# Altium PCB PCB_Ej3.PcbDoc
Units mm, origin at the board's own origin, x right, y up, seen from the top; angles counter-clockwise.
Board outline 100.08 x 100.08 mm, 2 copper layers (Top Layer, Bottom Layer); 8 components, 12 nets, 52 pads, 0 vias.
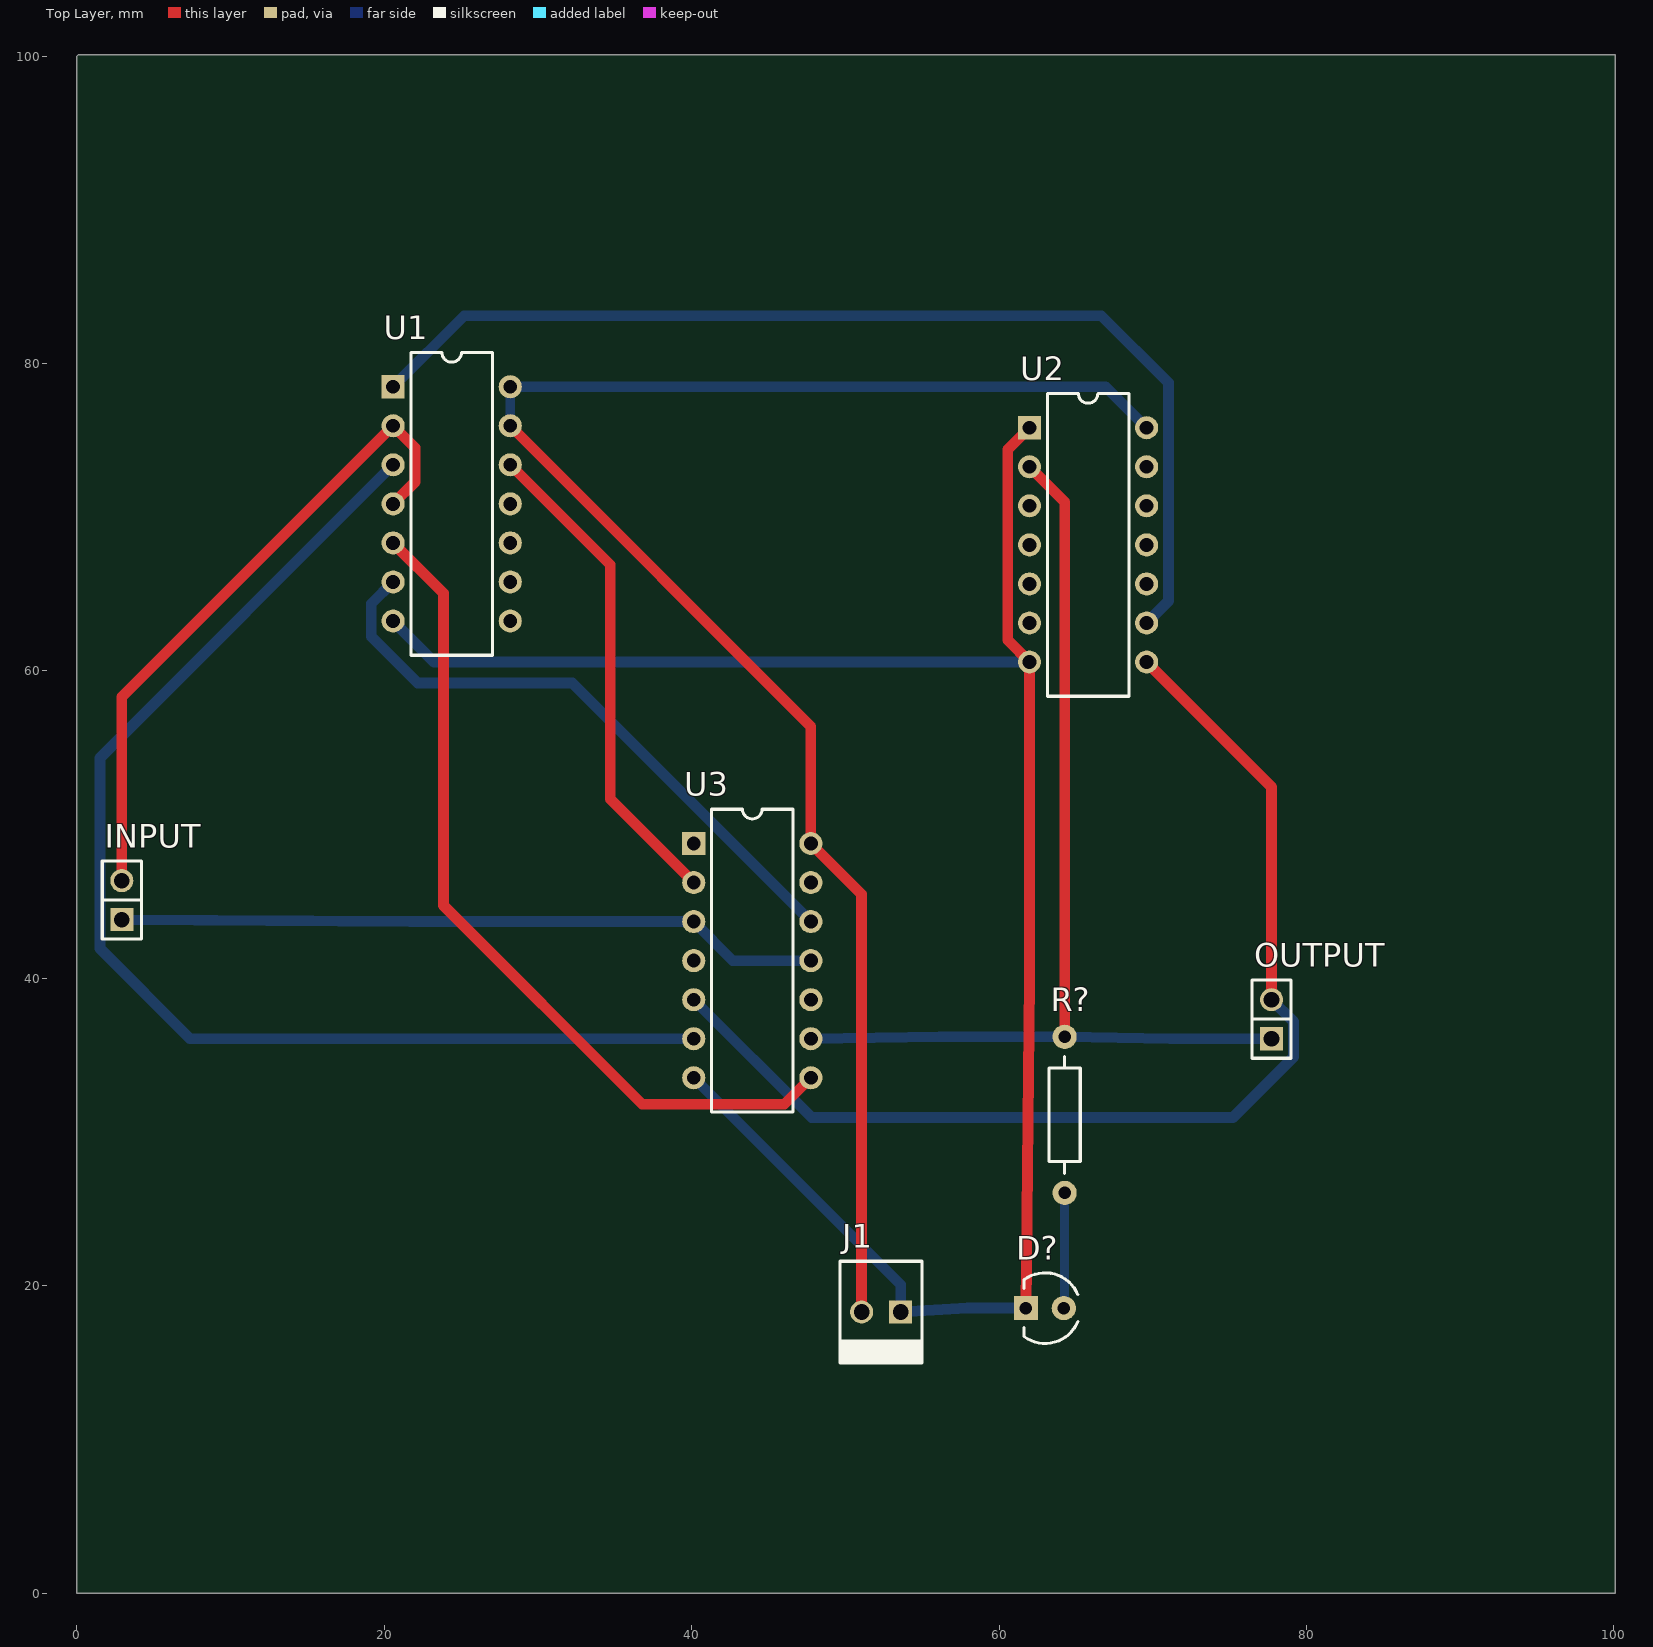
[diagram p0: Top Layer view]
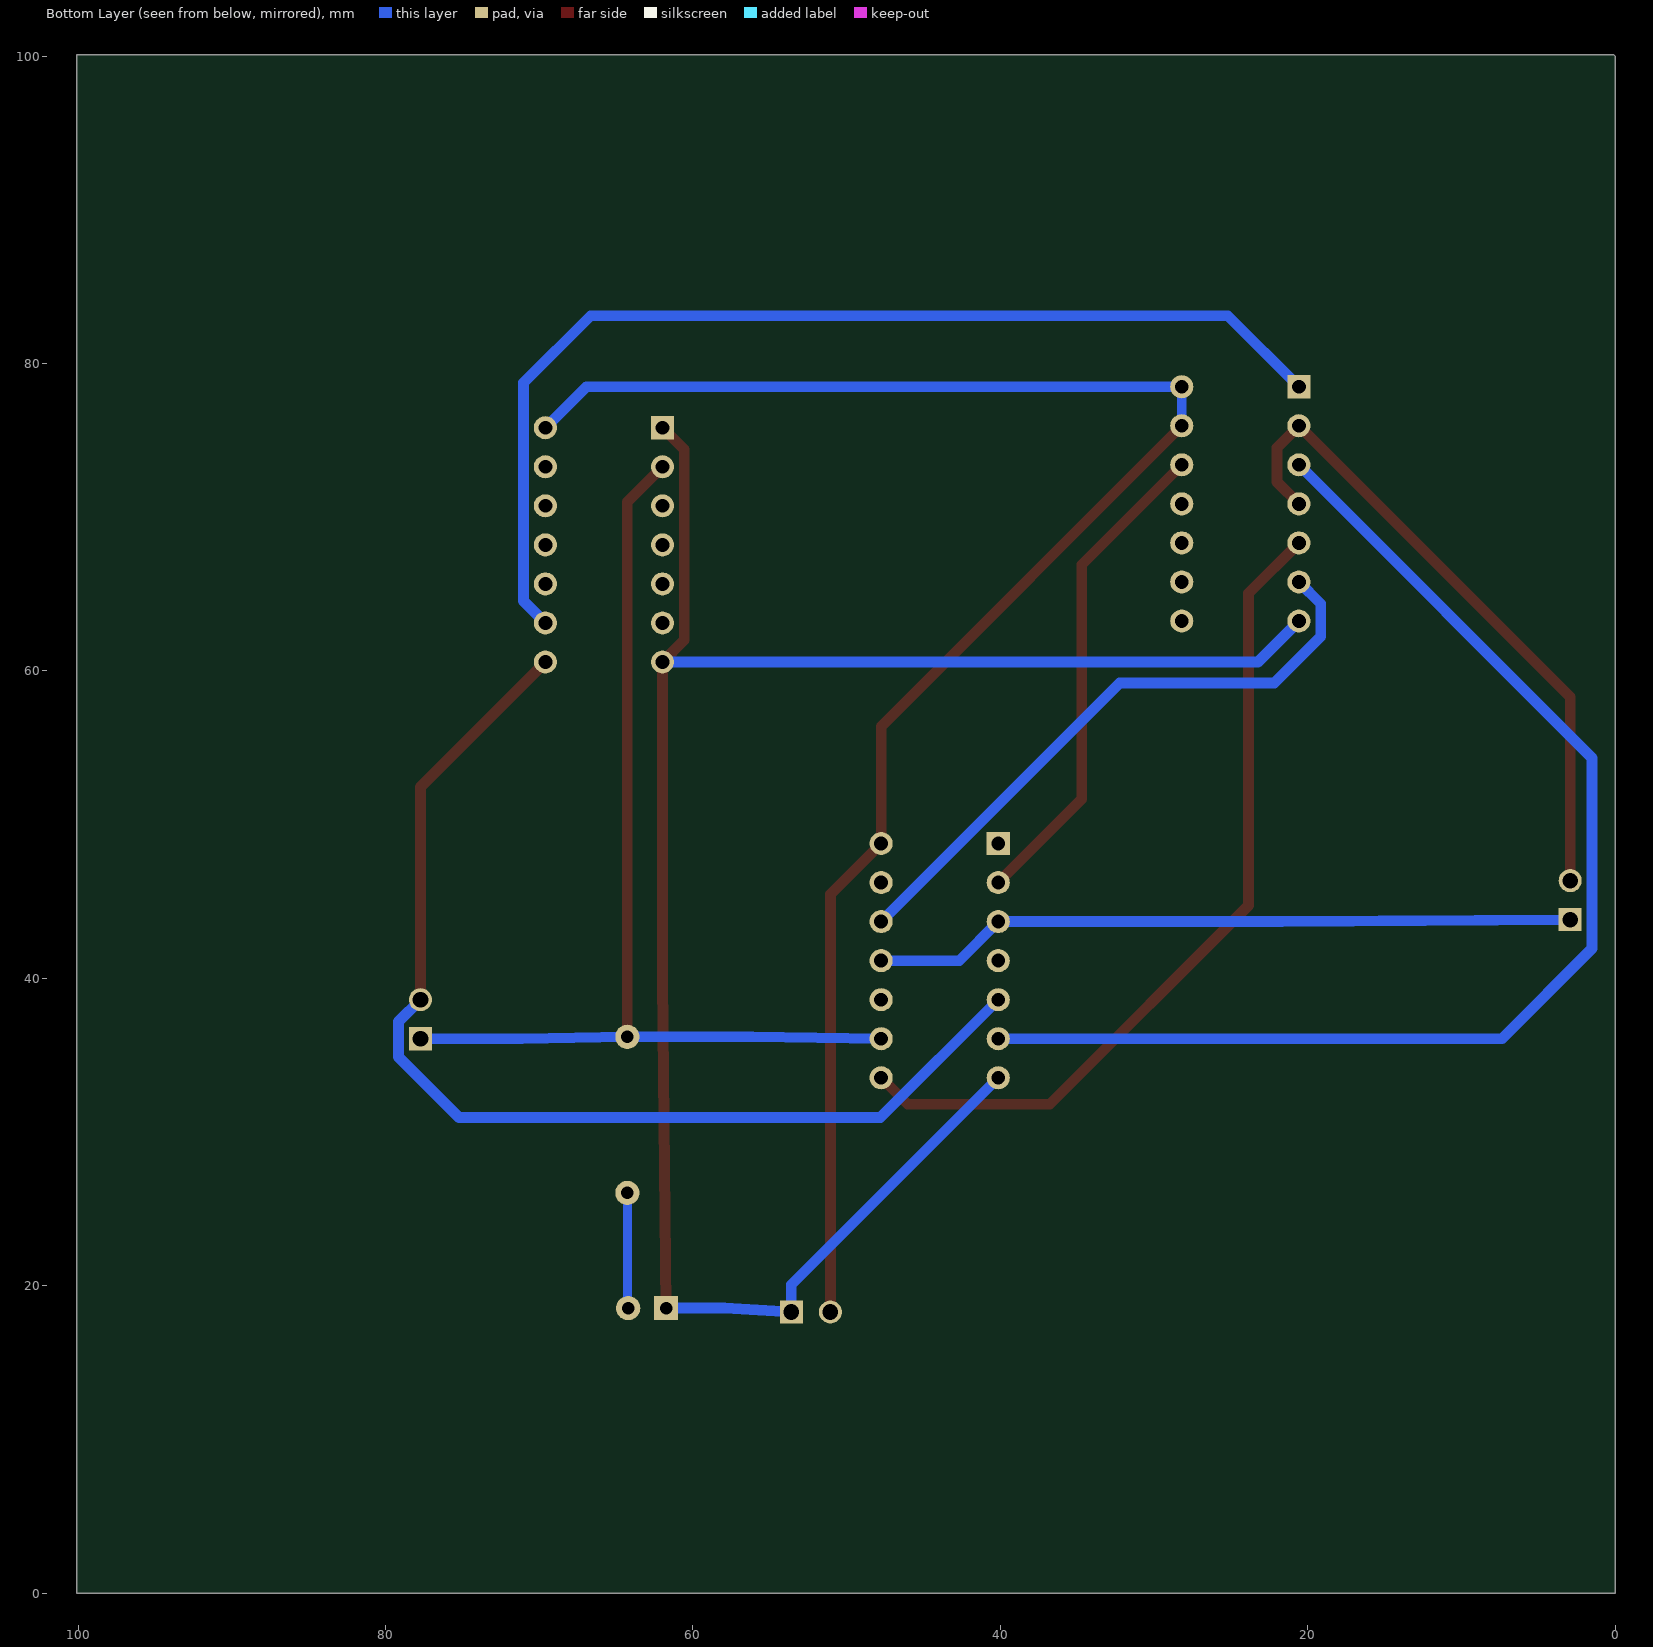
[diagram p1: Bottom Layer view, seen from below]

## Layer stack, top to bottom
Top Solder: solder mask 0.0102, Solder Resist, Dk 3.5
Top Layer: signal copper 0.0356
Dielectric 1: dielectric 0.32, FR-4, Dk 4.8
Bottom Layer: signal copper 0.0356
Bottom Solder: solder mask 0.0102, Solder Resist, Dk 3.5

## Board outline
0,0 100.076,0 100.076,100.076 0.076,100.076 0,100

## Design rules (kind name [scope] priority, off if disabled: settings)
Clearance [All] p1: gap=0.3 ignorepadtopadclearanceinfootprint=FALSE
PolygonConnect [All] p1: connectstyle=Relief reliefconductorwidth=0.254 reliefentries=4 polygonreliefangle="90 Angle" airgapwidth=0.254
RoutingVias [All] p1: holewidth=0.711 width=1.27 viastyle="Through Hole" minholewidth=0.711 minwidth=2 maxholewidth=0.711 maxwidth=2
SolderMaskExpansion [All] p1: expansion=0.102
Width [All] p1: maxlimit=0.9 minlimit=0.6 preferedwidth=0.7
30 further rules are at their usual default settings.

## Components (designator, comment, footprint, x,y, rotation, side; value= is the part's Value field where it differs from the comment)
D? "LED" LED3 62.992,18.542 r180 top
INPUT "CON2" SIP2 2.921,45.085 r90 top
J1 "MOLEX2" MOLEX2 53.594,18.288 r180 top
OUTPUT "CON2" SIP2 77.724,37.338 r90 top
R? "RES" RES400 64.262,36.195 r270 top
U1 "SN74HC11N" N014 24.384,70.866 r270 top
U2 "SN74HC4075N" N014 65.786,68.199 r270 top
U3 "SN74LS74AN" N014D 43.942,41.148 r270 top

## Footprints (in the part's own frame and the unit in brackets; to place one, negate y for a bottom-side part, rotate by r counter-clockwise, add the part's x,y. Pads: shape width x height; smd on the part's side, far side on the other; paste and mask are expansions set on the pad)
LED3 [mil]
  round 62 hole 32: 1(-48,0)
  rect 62x62 hole 32: 2(49,0)
  silkscreen extent -84,-90 54,90, body extent -65,-64 65,65, height 19
MOLEX2 [mm]
  rect 1.5x1.5 hole 1.016: 1(0,0)
  round 1.5 hole 1.016: 2(2.54,0)
  silkscreen extent -1.4,-3.3 3.94,3.3, body extent -1.27,-3.17 3.81,3.18, height 10.74
N014 [mm] "DIP; 14 Leads; Row Spacing 7.62 mm; Pitch 2.54 mm"
  rect 1.5x1.5 hole 0.9: 1(-7.62,-3.81)
  round 1.5 hole 0.9: 2(-5.08,-3.81) 3(-2.54,-3.81) 4(0,-3.81) 5(2.54,-3.81) 6(5.08,-3.81) 7(7.62,-3.81) 8(7.62,3.81) 9(5.08,3.81) 10(2.54,3.81) 11(0,3.81) 12(-2.54,3.81) 13(-5.08,3.81) 14(-7.62,3.81)
  silkscreen extent -9.85,-2.65 9.85,2.65
N014D [mm] "DIP; 14 Leads; Row Spacing 7.62 mm; Pitch 2.54 mm"
  rect 1.5x1.5 hole 0.9: 1(-7.62,-3.81)
  round 1.5 hole 0.9: 2(-5.08,-3.81) 3(-2.54,-3.81) 4(0,-3.81) 5(2.54,-3.81) 6(5.08,-3.81) 7(7.62,-3.81) 8(7.62,3.81) 9(5.08,3.81) 10(2.54,3.81) 11(0,3.81) 12(-2.54,3.81) 13(-5.08,3.81) 14(-7.62,3.81)
  silkscreen extent -9.85,-2.65 9.85,2.65
RES400 [mil]
  round 62 hole 32: 1(0,0) 2(400,0)
  silkscreen extent 50,-40 350,40, body extent -12,-45 412,46, height 96
SIP2 [mm]
  rect 1.5x1.5 hole 1.016: 1(-1.27,0)
  round 1.5 hole 1.016: 2(1.27,0)
  silkscreen extent -2.54,-1.27 2.54,1.27

## Part data
U1: "Triple 3-Input Positive-AND Gate", ComponentLink1Description="Manufacturer Link", ComponentLink1URL=http://www.ti.com/, ComponentLink2Description=Datasheet, ComponentLink2URL=http://www-s.ti.com/sc/ds/SN74HC11.pdf, DatasheetVersion=May-1997, LatestRevisionDate=04-Mar-2005, LatestRevisionNote="Stylized 3D Model Added.", PackageDescription="DIP; 14 Leads; Row Spacing 7.62 mm; Pitch 2.54 mm", PackageReference=N014, PackageVersion=Oct-1995, Published=8-Jun-2000, Publisher="Altium Limited"
U2: "Triple 3-Input Positive-OR Gate", ComponentLink1Description="Manufacturer Link", ComponentLink1URL=http://www.ti.com/, ComponentLink2Description=Datasheet, ComponentLink2URL=http://www-s.ti.com/sc/ds/sn74hc4075.pdf, DatasheetVersion=Sep-1987, LatestRevisionDate=04-Mar-2005, LatestRevisionNote="Stylized 3D Model Added.", PackageDescription="DIP; 14 Leads; Row Spacing 7.62 mm; Pitch 2.54 mm", PackageReference=N014, PackageVersion=Oct-1995, Published=8-Jun-2000, Publisher="Altium Limited"
U3: "Dual D-Type Positive-Edge-Triggered Flip-Flop with Preset and Clear", ComponentLink1Description="Manufacturer Link", ComponentLink1URL=http://www.ti.com/, ComponentLink2Description=Datasheet, ComponentLink2URL=http://www-s.ti.com/sc/ds/sn74ls74a.pdf, DatasheetVersion=Mar-1988, LatestRevisionDate=04-Mar-2005, LatestRevisionNote="Stylized 3D Model Added.", PackageDescription="DIP; 14 Leads; Row Spacing 7.62 mm; Pitch 2.54 mm", PackageReference=N014D, PackageVersion=Oct-1995, Published=8-Jun-2000, Publisher="Altium Limited"

## Nets (pads, with @x,y where several pads share a name; then routed paths per layer and width w, separated by ;. In a path a pad name is that pad's centre, name@x,y a point inside that pad or via, vN(x,y) a via of type N, cw(c..) or ccw(c..) an arc to the next point about the centre after c; other vN are vias at no path point)
CLOCK: INPUT.1 U3.3 U3.11 | length 45.9
  Bottom Layer w0.7: INPUT.1 21.666,43.688 U3.3 42.672,41.148 U3.11
D0: U1.6 U3.12 | length 40.4
  Bottom Layer w0.7: U1.6 19.152,64.364 19.152,62.23 22.174,59.207 32.233,59.207 U3.12
D1: U1.12 U3.2 | length 32.1
  Top Layer w0.7: U1.12 34.696,66.904 34.696,51.664 U3.2
GND: D?.2 J1.1 U1.7 U2.1 U2.7 U3.7 | length 129.9
  Top Layer w0.7: D?.2 61.976,39.802 U2.7 60.554,62.001 60.554,74.397 U2.1
  Bottom Layer w0.7: U1.7 23.241,60.579 U2.7 ; U3.7 53.594,20.066 J1.1 57.937,18.542 D?.2
NetD?_1: D?.1 R?.2 | length 7.5
  Bottom Layer w0.6: D?.1 64.262,18.593 R?.2
NetINPUT_2: INPUT.2 U1.2 U1.4 | length 43.2
  Top Layer w0.7: INPUT.2 2.921,58.293 U1.2 21.996,74.524 21.996,72.288 U1.4
NetU1_1: U1.1 U2.9 | length 70.4
  Bottom Layer w0.7: U1.1 25.197,83.109 66.65,83.109 71.018,78.74 71.018,64.541 U2.9
NetU1_3: U1.3 U3.6 | length 80.4
  Bottom Layer w0.7: U1.3 1.499,54.331 1.499,41.935 7.366,36.068 U3.6
NetU1_5: U1.5 U3.8 | length 54.9
  Top Layer w0.7: U1.5 23.851,65.049 23.851,44.729 36.779,31.801 46.025,31.801 U3.8
Q0: OUTPUT.1 R?.1 U2.2 U3.9 | length 68
  Top Layer w0.7: U2.2 64.262,70.993 R?.1
  Bottom Layer w0.7: U3.9 56.134,36.195 R?.1 71.12,36.068 OUTPUT.1
Q1: OUTPUT.2 U2.8 U3.5 | length 73.5
  Top Layer w0.7: U2.8 77.724,52.451 OUTPUT.2
  Bottom Layer w0.7: U3.5 47.803,30.937 75.209,30.937 79.146,34.874 79.146,37.186 OUTPUT.2
VCC: J1.2 U1.13 U1.14 U2.14 U3.14 | length 112.2
  Top Layer w0.7: U1.13 47.752,56.388 U3.14 51.054,45.466 J1.2
  Bottom Layer w0.6: U1.13 U1.14
  Bottom Layer w0.7: U1.14 66.929,78.486 U2.14
pads on no net: U1.8 U1.9 U1.10 U1.11 U2.3 U2.4 U2.5 U2.6 U2.10 U2.11 U2.12 U2.13 U3.1 U3.4 U3.10 U3.13